# EAGLE board entireboard_v1 (EAGLE 9.2.0)

Size 30 x 30 mm. Coordinates in mm from the lower left corner, seen from the top.
Outline: 0,0 30,0 30,30 0,30 0,0
Copper layers (1*16): Top 0.035mm / dielectric 1.5mm / Bottom 0.035mm
Design rules "default": minimum track width 6mil, minimum drill 0.35mm, track to track 6mil, track to pad 6mil, pad to pad 6mil, via to via 6mil, smd to smd 6mil, copper to edge 40mil, drill to drill 6mil, minimum pad ring 10mil, minimum via ring 8mil, stop-mask expansion 4mil, vias tented up to drill 0mil, thermal gap 10mil
Net classes: 1 thick: width 1.016 mm; 2 power: width 0.61 mm

## Footprints (pad centres in the part's own frame; a part is rotated, then mirrored left to right if it is on the bottom)
PTH_2.54MM_01X01 = drill 1: P$1 0,0
2-SMD = smd 1 x 1.8: P$1 -1.25,0; P$2 1.25,0
4-SMD = smd 0.85 x 0.75: P$1 -0.675,-0.525; P$2 0.675,-0.525; P$3 0.675,0.525; P$4 -0.675,0.525
SW_1188E = smd 1.45 x 1: P$1 -3.5,-0.5; P$2 3.375,-0.5 | smd 0.9 x 1.3: P$3 -2.1,1.3; P$4 2.1,1.3 | hole 0.9: 1.15,0; -1.15,0
0402 = smd 0.686 x 0.762: 1 -0.533,0; 2 0.533,0
C0402 = smd 0.7 x 0.9: 1 -0.65,0; 2 0.65,0
CC2652R1_QFN-48 = smd 0.7 x 0.25: 1 -3.4,2.75; 2 -3.4,2.25; 3 -3.4,1.75; 4 -3.4,1.25; 5 -3.4,0.75; 6 -3.4,0.25; 7 -3.4,-0.25; 8 -3.4,-0.75; 9 -3.4,-1.25; 10 -3.4,-1.75; 11 -3.4,-2.25; 12 -3.4,-2.75; 25 3.4,-2.75; 26 3.4,-2.25; 27 3.4,-1.75; 28 3.4,-1.25; 29 3.4,-0.75; 30 3.4,-0.25; 31 3.4,0.25; 32 3.4,0.75; 33 3.4,1.25; 34 3.4,1.75; 35 3.4,2.25; 36 3.4,2.75 | smd 0.25 x 0.7: 13 -2.75,-3.4; 14 -2.25,-3.4; 15 -1.75,-3.4; 16 -1.25,-3.4; 17 -0.75,-3.4; 18 -0.25,-3.4; 19 0.25,-3.4; 20 0.75,-3.4; 21 1.25,-3.4; 22 1.75,-3.4; 23 2.25,-3.4; 24 2.75,-3.4; 37 2.75,3.4; 38 2.25,3.4; 39 1.75,3.4; 40 1.25,3.4; 41 0.75,3.4; 42 0.25,3.4; 43 -0.25,3.4; 44 -0.75,3.4; 45 -1.25,3.4; 46 -1.75,3.4; 47 -2.25,3.4; 48 -2.75,3.4 | smd 5.15 x 5.15: EGP 0,0
R0402 = smd 0.5 x 0.6: P$1 -0.55,0; P$2 0.55,0
FTSH-105-01-XXX-DV-K = smd 0.737 x 2.794: 1 -2.54,-2.032; 2 -2.54,2.032; 3 -1.27,-2.032; 4 -1.27,2.032; 5 0,-2.032; 6 0,2.032; 7 1.27,-2.032; 8 1.27,2.032; 9 2.54,-2.032; 10 2.54,2.032
RHD2000_EVAL_BOARD_0805 = smd 0.965 x 1.524: 1 -1.041,0; 2 1.041,0
INDC1608X95 = smd 0.85 x 0.7: 1 -0.775,0; 2 0.775,0
L0402 = smd 0.5 x 0.6: P$1 -0.55,0; P$2 0.55,0
RHD2000_EVAL_BOARD_0402 = smd 0.686 x 0.762: 1 -0.533,0; 2 0.533,0
R0402' = smd 0.6 x 0.7: 1 -0.5,0; 2 0.5,0
RHD2000_EVAL_BOARD_TESTPOINT_SMALL = drill 0.813 octagon: 1 0,0
QFN56_8_X_8_LARGE = smd 0.9 x 0.25: 1 -4.05,3.25; 2 -4.05,2.75; 3 -4.05,2.25; 4 -4.05,1.75; 5 -4.05,1.25; 6 -4.05,0.75; 7 -4.05,0.25; 8 -4.05,-0.25; 9 -4.05,-0.75; 10 -4.05,-1.25; 11 -4.05,-1.75; 12 -4.05,-2.25; 13 -4.05,-2.75; 14 -4.05,-3.25; 29 4.05,-3.25; 30 4.05,-2.75; 31 4.05,-2.25; 32 4.05,-1.75; 33 4.05,-1.25; 34 4.05,-0.75; 35 4.05,-0.25; 36 4.05,0.25; 37 4.05,0.75; 38 4.05,1.25; 39 4.05,1.75; 40 4.05,2.25; 41 4.05,2.75; 42 4.05,3.25 | smd 0.25 x 0.9: 15 -3.25,-4.05; 16 -2.75,-4.05; 17 -2.25,-4.05; 18 -1.75,-4.05; 19 -1.25,-4.05; 20 -0.75,-4.05; 21 -0.25,-4.05; 22 0.25,-4.05; 23 0.75,-4.05; 24 1.25,-4.05; 25 1.75,-4.05; 26 2.25,-4.05; 27 2.75,-4.05; 28 3.25,-4.05; 43 3.25,4.05; 44 2.75,4.05; 45 2.25,4.05; 46 1.75,4.05; 47 1.25,4.05; 48 0.75,4.05; 49 0.25,4.05; 50 -0.25,4.05; 51 -0.75,4.05; 52 -1.25,4.05; 53 -1.75,4.05; 54 -2.25,4.05; 55 -2.75,4.05; 56 -3.25,4.05 | smd 4.8 x 4.8: CENTER 0,0
DN007+0 = smd 0.46 x 1: FEED 2.22,-2.8 | smd 1.01 x 0.74: GND -1.16,-2.93; GND@1 1.035,-2.93

## Placement (x,y rotation side)
3.3V  MF-CON-2.54mm-01x01  [PTH_2.54MM_01X01]  -54.61,34.29 0 top  (outside the outline)
38.768KHZ  EPSON_32.768KHZ_CRYSTAL  [2-SMD]  -36.83,40.64 0 top  (outside the outline)
48MHZ  NDK_48MHZ_CRYSTAL  [4-SMD]  -20.32,45.72 0 top  (outside the outline)
BTN_RESET  SW_1188E  [SW_1188E]  2.24,15.59 270 top
C1  100n  [0402]  -52.07,40.64 0 top  (outside the outline)
C2  10n  [0402]  -55.88,40.64 0 top  (outside the outline)
C3  0.1uF  [C0402]  -38.1,22.86 0 top  (outside the outline)
C4  0.1uF  [C0402]  -44.45,22.86 0 top  (outside the outline)
C5  0.1uF  [C0402]  -50.8,22.86 0 top  (outside the outline)
C6  22uF  [C0402]  -43.18,29.21 0 top  (outside the outline)
C7  0.1uF  [C0402]  -57.15,22.86 0 top  (outside the outline)
C8  22uF  [C0402]  -49.53,29.21 0 top  (outside the outline)
C9  0.1uF  [C0402]  -17.78,29.21 0 top  (outside the outline)
C10  0.1uF  [C0402]  -24.13,29.21 0 top  (outside the outline)
C11  1.8pF  [C0402]  -30.48,29.21 0 top  (outside the outline)
C12  12pF  [C0402]  -55.88,29.21 0 top  (outside the outline)
C13  1pF  [C0402]  -35.56,34.29 0 top  (outside the outline)
C14  1pF  [C0402]  -40.64,34.29 0 top  (outside the outline)
C15  1pF  [C0402]  -45.72,34.29 0 top  (outside the outline)
C16  12pF  [C0402]  -17.78,34.29 0 top  (outside the outline)
C17  1uF  [C0402]  4.2,19.29 0 top
C18  12pF  [C0402]  -24.13,34.29 0 top  (outside the outline)
C19  12pF  [C0402]  -30.48,34.29 0 top  (outside the outline)
C20  0.1uF  [C0402]  -36.83,29.21 0 top  (outside the outline)
CC2652R1  CC2652R1  [CC2652R1_QFN-48]  11.22,16.35 0 top
CURRENT-SENSE  0.01ohm  [R0402]  -33.02,44.45 0 top  (outside the outline)
GND  MF-CON-2.54mm-01x01  [PTH_2.54MM_01X01]  -15.24,39.37 0 top  (outside the outline)
J1  FTSH-105-01-XXX-DV-K  [FTSH-105-01-XXX-DV-K]  5.65,5.09 90 top
L1  6.8uH  [RHD2000_EVAL_BOARD_0805]  -54.61,15.24 0 top  (outside the outline)
L2  BLM18HE152SN1D  [INDC1608X95]  -45.72,49.53 0 top  (outside the outline)
L3  2nH  [L0402]  -57,-19 0 top  (outside the outline)
L5  2.4nH  [L0402]  -57,-7 0 top  (outside the outline)
L6  2nH  [L0402]  -57,-11 0 top  (outside the outline)
L7  2.4nH  [L0402]  -57,-3 0 top  (outside the outline)
POWER_IND  LED-SMD  [RHD2000_EVAL_BOARD_0402]  -46.99,40.64 0 top  (outside the outline)
R1  100k  [R0402']  -21.59,40.64 0 top  (outside the outline)
R2  [R0402']  -41.91,44.45 0 top  (outside the outline)
R_CS  0.01ohm  [R0402]  -38.1,44.45 0 top  (outside the outline)
TP1  RHD2000_EVAL_BOARD_TESTPOINT_SMALL  [RHD2000_EVAL_BOARD_TESTPOINT_SMALL]  -57,-31 0 top  (outside the outline)
TP_ANT2  RHD2000_EVAL_BOARD_TESTPOINT_SMALL  [RHD2000_EVAL_BOARD_TESTPOINT_SMALL]  -57,-35 0 top  (outside the outline)
TP_PWR1  RHD2000_EVAL_BOARD_TESTPOINT_SMALL  [RHD2000_EVAL_BOARD_TESTPOINT_SMALL]  -57,-23 0 top  (outside the outline)
TP_PWR2  RHD2000_EVAL_BOARD_TESTPOINT_SMALL  [RHD2000_EVAL_BOARD_TESTPOINT_SMALL]  -57,-27 0 top  (outside the outline)
TP_SPI_CLK  RHD2000_EVAL_BOARD_TESTPOINT_SMALL  [RHD2000_EVAL_BOARD_TESTPOINT_SMALL]  -30.48,49.53 0 top  (outside the outline)
TP_SPI_CS  RHD2000_EVAL_BOARD_TESTPOINT_SMALL  [RHD2000_EVAL_BOARD_TESTPOINT_SMALL]  -38.1,49.53 0 top  (outside the outline)
TP_SPI_MISO  RHD2000_EVAL_BOARD_TESTPOINT_SMALL  [RHD2000_EVAL_BOARD_TESTPOINT_SMALL]  -21.59,49.53 0 top  (outside the outline)
TP_SPI_MOSI  RHD2000_EVAL_BOARD_TESTPOINT_SMALL  [RHD2000_EVAL_BOARD_TESTPOINT_SMALL]  -52.07,44.45 0 top  (outside the outline)
U2  RHD2216_QFN  [QFN56_8_X_8_LARGE]  22.33,9.08 0 top
U$2  INVERTED_F_ANTENNA+0  [DN007+0]  10.82,25.24 0 top

## Library data of the parts
3.3V GND = AxonMobile; HOUSEPART: YES; MPN: MF-CON-2.54mm-01x01; POPULATE: 1; URL: https://factory.macrofab.com/part/MF-CON-2.54mm-01x01
38.768KHZ 48MHZ BTN_RESET CC2652R1 J1 L1 POWER_IND TP1 TP_ANT2 TP_PWR1 TP_PWR2 TP_SPI_CLK TP_SPI_CS TP_SPI_MISO TP_SPI_MOSI = AxonMobile
C1 C2 = RHD2000_eval_board
C3-C20 = adafruit
CURRENT-SENSE L3 L5-L7 R_CS = MF_Passives; POPULATE: 1
L2 = BLM18HE152SN1D; DIGI-KEY_PART_NUMBER: 490-5216-1-ND; DIGI-KEY_PURCHASE_URL: https://www.digikey.com/product-detail/en/murata-electronics-north-america/BLM18HE152SN1D/490-5216-1-ND/1948392?utm_source=snapeda&utm_medium=aggregator&utm_campaign=symbol; MF: Murata Electronics; MP: BLM18HE152SN1D; PACKAGE: 0603 Samtec
R1 R2 = AxonMobile; SPICEPREFIX: R
U2 = RHD2000
U$2 = antenna

## Nets
DCDC_SW: CC2652R1.33 L1.1
GND: 48MHZ.P$2 48MHZ.P$4 BTN_RESET.P$1 BTN_RESET.P$2 BTN_RESET.P$3 C1.2 C2.2 C3.2 C4.2 C5.2 C6.2 C7.2 C8.2 C9.2 C10.2 C13.2 C15.2 C16.2 C17.2 C18.2 C19.2 C20.2 CC2652R1.EGP GND.P$1 J1.3 J1.5 J1.9 U2.2 U2.4 U2.6 U2.8 U2.10 U2.11 U2.12 U2.17 U2.29 U2.30 U2.32 U2.34 U2.36 U2.38 U2.40 U2.42 U2.44 U2.46 U2.48 U2.50 U2.52 U2.54 U2.56 U2.CENTER U$2.GND U$2.GND@1
JTAG_TCK: CC2652R1.25 J1.4
JTAG_TDI: CC2652R1.27 J1.8
JTAG_TDO: CC2652R1.26 J1.6
JTAG_TMS: CC2652R1.24 J1.2
N$1: C17.1 CC2652R1.23
N$2: CURRENT-SENSE.P$2 TP_ANT2.1 U$2.FEED
N$3: 48MHZ.P$1 CC2652R1.47
N$4: 48MHZ.P$3 CC2652R1.46
N$5: 38.768KHZ.P$1 C18.1 CC2652R1.3
N$6: C11.1 C12.2
N$7: C12.1 L3.P$2
N$8: C13.1 L3.P$1 L6.P$2
N$9: C14.2 L5.P$2 L6.P$1
N$10: 38.768KHZ.P$2 C19.1 CC2652R1.4
N$11: C11.2 CURRENT-SENSE.P$1 TP1.1
N$12: C16.1 L7.P$2
N$13: POWER_IND.1 R_CS.P$2 TP_PWR2.1
N$16: BTN_RESET.P$4 R2.2
N$42: C2.1 U2.28
RF_N: C15.1 CC2652R1.2 L5.P$1
RF_P: C14.1 CC2652R1.1 L7.P$1
SPI_CLK: CC2652R1.16 TP_SPI_CLK.1 U2.21
SPI_CS_TP: CC2652R1.12 TP_SPI_CS.1 U2.19
SPI_MISO: CC2652R1.14 TP_SPI_MISO.1 U2.25
SPI_MOSI: CC2652R1.15 TP_SPI_MOSI.1 U2.23
VCC: C1.1 U2.13 U2.26 U2.31
VDDR: C8.1 C9.1 C10.1 CC2652R1.45 CC2652R1.48 L1.2
VDDS: C3.1 C4.1 C5.1 C6.1 C7.1 CC2652R1.13 CC2652R1.22 CC2652R1.34 CC2652R1.44 L2.2 POWER_IND.2 R1.2 R_CS.P$1 TP_PWR1.1
WMCU_RESET: C20.1 CC2652R1.35 J1.10 R1.1 R2.1
WMCU_VDD: 3.3V.P$1 L2.1

## Tracks (layer width: path | path; a pad name or v marks a point on that pad's centre or on a via)
DCDC_SW  (1 unrouted)
GND  (52 unrouted)
JTAG_TCK  (1 unrouted)
JTAG_TDI  (1 unrouted)
JTAG_TDO  (1 unrouted)
JTAG_TMS  (1 unrouted)
N$1  (1 unrouted)
N$2  (2 unrouted)
N$3  (1 unrouted)
N$4  (1 unrouted)
N$5  (2 unrouted)
N$6  (1 unrouted)
N$7  (1 unrouted)
N$8  (2 unrouted)
N$9  (2 unrouted)
N$10  (2 unrouted)
N$11  (2 unrouted)
N$12  (1 unrouted)
N$13  (2 unrouted)
N$16  (1 unrouted)
N$42  (1 unrouted)
RF_N  (2 unrouted)
RF_P  (2 unrouted)
SPI_CLK  (2 unrouted)
SPI_CS_TP  (2 unrouted)
SPI_MISO  (2 unrouted)
SPI_MOSI  (2 unrouted)
VCC  (3 unrouted)
VDDR  (5 unrouted)
VDDS  (13 unrouted)
WMCU_RESET  (4 unrouted)
WMCU_VDD  (1 unrouted)